# Altium PCB PCBPIC80_A3979_4lvl.PcbDoc (part 2 of 2)
Units mm, origin at the board's own origin, x right, y up, seen from the top; angles counter-clockwise.
Board outline 150.1 x 100.1 mm, 4 copper layers (Top Layer, InternalPlane1, InternalPlane2, Bottom Layer); 110 components, 115 nets, 451 pads, 191 vias.
Unrouted connection lines stored in the file: 6.
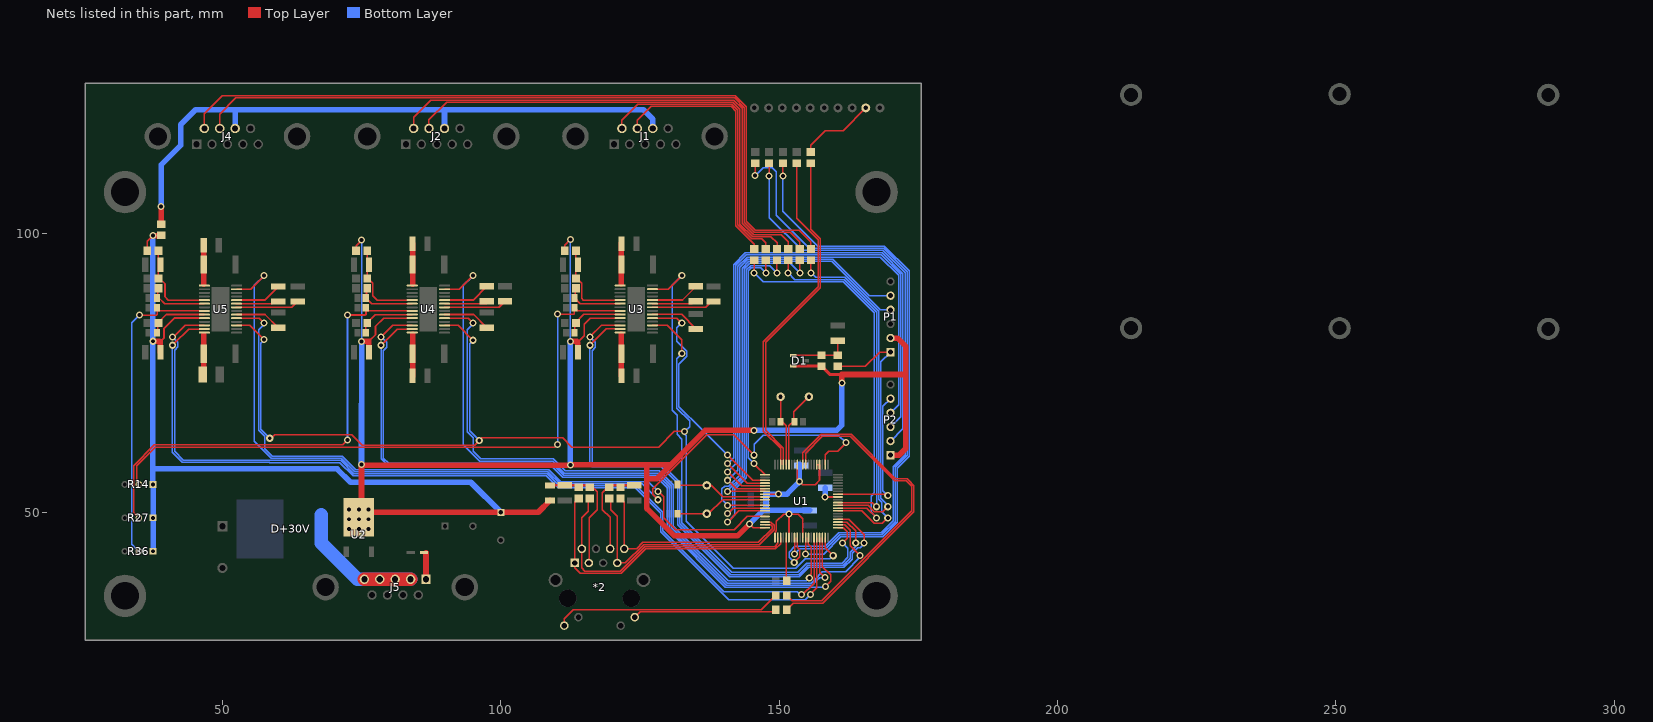
[diagram p4: the nets of this part, all layers, seen from the top]

## Via types
v1: diameter 1.27, hole 0.711, Top Layer to Bottom Layer, 191 vias

## Nets (pads, with @x,y where several pads share a name; then routed paths per layer and width w, separated by ;. In a path a pad name is that pad's centre, name@x,y a point inside that pad or via, vN(x,y) a via of type N, cw(c..) or ccw(c..) an arc to the next point about the centre after c; other vN are vias at no path point) (continued)
MS1_ALFA: U1.4 U3.13 | length 101
  Top Layer w0.254: v1(116,80) 118.926,82.926 U3.13@121.439,82.926 ; U1.4@160.55,48.75 162.45,48.75 165.25,45.95 v1(165.25,44.5)
  Bottom Layer w0.254: v1(116,80) 116,58.586 116.39,58.196 128.801,58.196 131.756,55.241 131.756,47.789 141.12,38.425 153.637,38.425 155.299,40.087 161.622,40.087 163.115,41.58 163.115,42.661 164.065,43.611 164.557,43.611 165.2,44.254 164.954,44.5 v1(165.25,44.5)
MS1_DELTA: U1.78 U4.13 | length 131
  Top Layer w0.254: v1(78.5,80) 81.412,82.912 U4.13@84.095,82.912 ; U1.78@157.75,45.45 157.75,40.25 159.25,38.75 159.25,37.65 v1(158.3,36.7)
  Bottom Layer w0.254: v1(78.5,80) 78.481,79.981 78.481,59.63 79.671,58.44 95.859,58.44 108.944,58.44 109.036,58.348 111.108,56.276 128.027,56.276 129.851,54.452 129.851,47 140.331,36.52 158.13,36.52 158.3,36.69 v1@158.159,36.549
MS1_FOCUS: U1.76 U5.13 | length 164.5
  Top Layer w0.254: v1@41.35,80.35 43.912,82.912 45.312,82.912 U5.13@46.757,82.912 ; v1@155.625,35 155.625,35.325 156.75,36.45 U1.76@156.75,45.45
  Bottom Layer w0.254: v1(41,80) 41,60.786 42.805,58.981 58.441,58.981 58.487,58.935 71.07,58.935 73.47,56.535 95.07,56.535 108.154,56.535 108.246,56.443 110.318,54.371 124.168,54.371 128.708,49.831 128.708,46.526 140.903,34.331 154.706,34.331 155.375,35 v1@155.625,35 ; v1@155.9,35 v1@156,34.9
  other v1: 155.625,35.25
MS2_ALFA: U1.3 U3.12 | length 99.2
  Top Layer w0.254: U1.3@160.55,48.25 162.15,48.25 163.75,46.65 v1(163.75,44.5)
  Top Layer w0.3: v1(116,81.5) 118.076,83.576 U3.12@121.439,83.576
  Bottom Layer w0.254: v1(116,81.5) 117,80.5 117,79.6 116.4,79 116.4,58.725 116.525,58.6 128.936,58.6 132.137,55.399 132.137,47.947 141.278,38.806 153.48,38.806 154.832,40.158 155.142,40.468 161.464,40.468 162.734,41.738 162.734,42.818 163.7,43.785 163.7,44.274 v1@163.474,44.5
MS2_DELTA: U1.77 U4.12 | length 130.2
  Top Layer w0.254: v1(78.5,81.5) 80.562,83.562 U4.12@84.095,83.562 ; U1.77@157.25,45.45 157.25,39.25 158,38.5 v1@158,38
  Bottom Layer w0.254: v1(78.5,81.5) 79.5,80.5 79.5,79.6 78.9,79 78.9,59.75 79.829,58.821 96.017,58.821 109.101,58.821 109.193,58.729 111.265,56.657 128.184,56.657 130.232,54.61 130.232,47.158 140.488,36.901 154.269,36.901 155.178,36.901 155.897,36.901 155.926,36.93 156.67,37.674 157.246,38.25 157.75,38.25 v1@158,38
  other v1: 158.25,38.25
MS2_FOCUS: U1.75 U5.12 | length 164.5
  Top Layer w0.254: v1(41,81.5) 41.3,81.5 43.362,83.562 U5.12@46.757,83.562 ; v1@154,35 156.289,37.289 156.289,45.411 U1.75@156.25,45.45
  Bottom Layer w0.254: v1(41,81.5) 42,80.5 42,79.7 41.4,79.1 41.4,60.925 42.963,59.362 58.599,59.362 58.645,59.316 71.228,59.316 73.628,56.916 95.228,56.916 108.312,56.916 108.404,56.824 110.476,54.752 124.326,54.752 129.089,49.989 129.089,46.684 140.015,35.758 153.242,35.758 v1@154,35
  other v1: 154,35.25
Net*2_1: *2.1 R20.2 U1.63 | length 52.7
  Top Layer w0.254: *2.1@113.284,40.894 113.284,40.066 114.3,39.05 121.625,39.05 126.009,43.434 149.321,43.434 150.25,44.363 U1.63@150.25,45.45 ; *2.1@113.305,40.894 113.305,51.805 R20.2@113.5,52
Net*2_2: *2.2 R19.2 U1.62 | length 51.3
  Top Layer w0.254: *2.2@114.554,43.434 114.554,39.996 115.119,39.431 121.467,39.431 122.549,40.513 125.851,43.815 149.163,43.815 149.75,44.402 U1.62@149.75,45.45 ; *2.2@114.575,43.434 114.575,49.025 115.7,50.15 115.7,52.05 R19.2@115.5,52.25
Net*2_3: *2.3 C18.2 L1.2 R19.1 R20.1 | length 23.1
  Top Layer w0.254: R19.1@115.5,54.5 116.5,54.5 117.3,53.7 117.3,50.475 115.845,49.02 *2.3@115.845,40.894
  Top Layer w0.5: L1.2@108.5,54.85 111,54.85 113.15,54.85 R19.1@116.1,54.85
Net*2_6: *2.6 C17.2 R17.1 R18.1 | length 17
  Top Layer w0.254: *2.6@119.634,43.434 119.634,49.066 118.25,50.45 118.25,53.55 118.95,54.25 R17.1@119.75,54.25
  Top Layer w0.4: R17.1@119.5,54.85 C17.2@124,54.85
Net*2_7: *2.7 R17.2 U1.58 | length 45.2
  Top Layer w0.254: R17.2@119.75,52.25 119.75,50.425 120.904,49.271 *2.7@120.904,40.894 122.391,40.894 125.693,44.196 146.41,44.196 149.096,46.882 149.096,47.675 148.521,48.25 U1.58@147.45,48.25
Net*2_8: *2.8 R18.2 U1.59 | length 39.2
  Top Layer w0.254: R18.2@121.5,52.5 122.195,51.805 *2.8@122.195,43.445 ; *2.8@122.174,43.434 124.393,43.434 125.536,44.577 146.252,44.577 148.715,47.04 148.715,47.517 148.482,47.75 U1.59@147.45,47.75
Net*2_9: *2.9 R10.2 | length 40.9
  Top Layer w0.254: *2.9@111.404,29.642 111.404,30.904 113,32.5 124.849,32.5 146.75,32.5 R10.2@149.335,35.085
Net*2_12: *2.12 R9.2 | length 25.4
  Top Layer w0.254: *2.12@124.388,31.5 125.007,32.119 148.975,32.119 R9.2@149.368,32.512
NetC2_2: C2.2 D1.1 R7.1 R8.2 | length 10.5
  Top Layer w0.254: D1.1@152.545,78.166 160.478,78.166 R8.2@160.528,78.216 C2.2@160.528,80.719
NetC3_1: C3.1 U1.36 Y1.1 | length 12.6
  Top Layer w0.254: Y1.1@150.25,70.75 150.25,66.55 151.25,65.55 U1.36@151.25,58.55
NetC4_2: C4.2 U1.35 Y1.2 | length 13.7
  Top Layer w0.254: U1.35@151.75,58.55 151.75,65.5 152.6,66.35 152.6,68.02 Y1.2@155.33,70.75
NetC5_1: C5.1 U1.50 Y2.1 | length 16.8
  Top Layer w0.254: C5.1@131.75,49.7 137.275,49.7 139.825,52.25 U1.50@147.45,52.25
NetC6_2: C6.2 U1.49 Y2.2 | length 17.2
  Top Layer w0.254: C6.2@131.75,55.5 131.75,54.825 137.755,54.825 139.83,52.75 U1.49@147.45,52.75
NetC7_1: C7.1 U3.22 | length 11.7
  Top Layer w0.254: U3.22@127.239,86.826 136.826,86.826 137.95,87.95 C7.1@138.5,87.95
NetC8_2: C8.2 R11.2 U3.14 | length 7.5
  Top Layer w1: C8.2@121.65,74.525 121.65,81.975
NetC9_2: C9.2 R12.2 U3.1 | length 7.2
  Top Layer w1: 121.65,91.05 C9.2@121.65,98.3
NetC10_2: C10.2 R15.2 U3.6 | length 10.2
  Top Layer w0.254: C10.2@113.25,88.5 114.274,87.476 U3.6@121.439,87.476 ; C10.2@113.4,88.65 R15.2@113.4,90.25
NetC11_2: C11.2 R16.2 R51.2 U3.5 | length 16.1
  Top Layer w0.254: R51.2@113.5,97 113.5,92.1 114.5,91.1 114.5,88.4 114.774,88.126 U3.5@121.439,88.126
NetC12_2: C12.2 R14.2 U3.8 | length 116.7
  Top Layer w0.254: R14.2@35,55 34.6,55.4 34.6,58.361 37.919,61.68 92.01,61.68 93.068,61.68 96.255,61.68 109.68,61.68 v1(110.2,62.2) ; v1(110.2,85.6) 113.2,85.6 113.2,86.7 C12.2@113.25,86.75 113.824,86.176 U3.8@121.439,86.176
  Bottom Layer w0.254: v1(110.2,62.2) 110.2,62.8 v1(110.2,85.6)
NetC13_2: C13.2 R13.2 U3.9 | length 10.5
  Top Layer w0.254: C13.2@113.25,82.25 113.25,83.85 114.926,85.526 U3.9@121.439,85.526
NetC14_2: C14.2 U3.20 | length 8.8
  Top Layer w0.254: U3.20@127.239,85.526 132.474,85.526 C14.2@135,83
NetC15_1: C15.1 U3.24 | length 8.8
  Top Layer w0.3: U3.24@127.239,88.126 132.625,88.125 C15.1@135.05,90.55
NetC15_2: C15.2 U3.23 | length 8
  Top Layer w0.3: U3.23@127.239,87.475 131.975,87.475 134.325,87.475 C15.2@135,88.15
NetC16_1: C16.1 U1.12 | length 4
  Top Layer w0.3: v1(158.25,52.75) U1.12@160.55,52.75
  Bottom Layer w1: v1(158.25,52.75) 158.275,52.75 158.25,52.725 C16.1@158.25,54.4
NetC19_1: C19.1 U4.22 | length 11.6
  Top Layer w0.35: U4.22@89.9,86.825 99.675,86.825 C19.1@101,88.15
NetC25_2: C25.2 R25.2 U4.9 | length 10.6
  Top Layer w0.254: C25.2@75.75,82.25 75.75,83.85 77.412,85.512 U4.9@84.095,85.512
NetC26_2: C26.2 R26.2 U4.6 | length 10.4
  Top Layer w0.254: C26.2@75.75,88.5 76.788,87.462 U4.6@84.095,87.462
  Top Layer w0.35: C26.2@75.9,88.65 R26.2@75.9,90.25
NetC27_2: C27.2 R28.2 R29.2 U4.5 | length 15.9
  Top Layer w0.254: R29.2@76,97 76,92.1 77,91.1 77,88.9 77.788,88.112 U4.5@84.095,88.112
NetC28_2: C28.2 R23.2 U4.14 | length 7.5
  Top Layer w1: C28.2@84.15,74.45 84.15,81.95
NetC29_2: C29.2 R27.2 U4.8 | length 86.1
  Top Layer w0.254: R27.2@35,49 34.098,49.902 34.098,58.398 37.8,62.1 59.075,62.1 71.6,62.1 v1(72.5,63) ; v1@72.15,62.65 v1@72.5,62.65 ; C29.2@75.638,86.162 U4.8@84.095,86.162
  Top Layer w0.35: v1(72.5,85.4) 75.6,85.4 75.75,85.55 C29.2@75.75,86.75
  Bottom Layer w0.35: v1@72.5,62.65 v1(72.5,85.4)
NetC30_2: C30.2 R30.2 R37.2 U5.5 | length 16.3
  Top Layer w0.3: R37.2@38.4,92 R37.2@38.5,92 ; R30.2@38.5,97 R37.2@38.5,92 ; U5.5@46.757,88.112 40.288,88.112 39.672,88.728 39.672,91.028 38.7,92 R37.2@38.5,92
NetC31_2: C31.2 U4.20 | length 8.6
  Top Layer w0.3: U4.20@89.895,85.512 95.138,85.512 C31.2@97.5,83.15
NetC32_1: C32.1 U4.24 | length 8.9
  Top Layer w0.35: U4.24@89.9,88.125 95.025,88.125 C32.1@97.5,90.6 C32.1@97.5,90.85
NetC32_2: C32.2 U4.23 | length 7.6
  Top Layer w0.254: U4.23@89.9,87.475 C32.2@97.5,87.475
NetC33_1: C33.1 U5.22 | length 11.6
  Top Layer w0.254: U5.22@52.402,86.827 62.427,86.827 63.35,87.75 C33.1@63.35,88
NetC34_2: C34.2 R33.2 U5.9 | length 10.6
  Top Layer w0.3: C34.2@38.4,82.4 38.4,84 39.912,85.512 U5.9@46.757,85.512
NetC35_2: C35.2 R35.2 U5.6 | length 10.5
  Top Layer w0.3: C35.2@38.25,88.5 38.6,88.5 39.638,87.462 U5.6@46.757,87.462 ; C35.2@38.4,88.65 R35.2@38.4,90.25
NetC37_2: C37.2 R31.2 U5.14 | length 7.3
  Top Layer w0.254: R31.2@46.6,78.55 R31.2@46.65,78.5
  Top Layer w0.6: R31.2@46.6,78.55 R31.2@46.8,78.75
  Top Layer w1: C37.2@46.657,74.907 46.657,81.9
NetC39_2: C39.2 U5.20 | length 8.4
  Top Layer w0.3: U5.20@52.557,85.512 57.638,85.512 C39.2@60,83.15
NetC40_1: C40.1 U5.24 | length 8.9
  Top Layer w0.35: U5.24@52.4,88.125 57.625,88.125 60,90.5 C40.1@60,90.85
NetC40_2: C40.2 U5.23 | length 7.9
  Top Layer w0.254: U5.23@52.4,87.475 C40.2@58.875,87.475
  Top Layer w0.35: C40.2@58.875,87.475 59.55,88.15 C40.2@60,88.15
NetC41_2: C41.2 R36.2 U5.8 | length 55.8
  Top Layer w0.254: v1(35.1,85.4) 38.1,85.4 38.25,85.55 38.25,86.162 38.838,86.162 U5.8@46.757,86.162
  Bottom Layer w0.254: R36.2@35,43 33.75,44.25 33.75,56.5 33.75,84.05 35,85.3 v1(35.1,85.4)
NetC50_2: C50.2 R24.2 U4.1 | length 7.2
  Top Layer w1: 84.15,90.975 C50.2@84.15,98.225
NetC51_2: C51.2 R32.2 U5.1 | length 7.2
  Top Layer w1: 46.65,91 C51.2@46.65,98.2
NetD+5V_1: D+5V.1 J5.1 | length 4.8
  Top Layer w1: J5.1@86.566,37.973 D+5V.1@86.566,42.75
NetD+30V_1: D+30V.1 D+30V.3 J5.2 J5.3 J5.4 J5.5 | length 32.1
  Top Layer w2.5: J5.5@75.486,37.973 J5.2@83.796,37.973
  Bottom Layer w2.5: D+30V.1@67.75,49.54 D+30V.3@67.75,44.46 74.237,37.973 J5.2@83.796,37.973
NetJ1_8: J1.8 J2.8 J4.8 R22.2 | length 114.3
  Top Layer w1: R22.2@39,101.75 v1(39,104.9)
  Bottom Layer w1: v1(39,104.9) 39,112.4 42.5,115.9 42.5,119.6 45.2,122.3 125.6,122.3 127.285,120.615 J1.8@127.285,118.94 ; J4.8@52.285,118.94 52.285,122.285 ; J2.8@89.885,118.94 89.885,122.285
NetP1_1: P1.1 R8.1 U1.9 | length 49.3
  Top Layer w0.254: R8.1@160.528,76.216 165.491,76.216 168.025,78.75 P1.1@170,78.75 ; U1.9@160.55,51.25 165.95,51.25 167.1,50.1 168.6,50.1 v1(169.5,51) ; v1@169.45,51.25 v1@169.5,51.2
  Bottom Layer w0.254: v1@169.5,51.1 169.5,51.239 168.243,52.496 168.243,76.993 P1.1@170,78.75
NetP1_4: P1.4 U1.47 | length 78.7
  Top Layer w0.254: v1(140.75,53.75) U1.47@147.45,53.75
  Bottom Layer w0.254: v1(140.75,53.75) 140.75,53.928 143.324,56.502 143.324,58.208 143.324,93.869 144.531,95.076 159.44,95.076 168.146,86.37 P1.4@170,86.37
NetP1_5: P1.5 U1.52 | length 82.1
  Top Layer w0.254: v1(140.75,51.25) U1.52@147.45,51.25
  Bottom Layer w0.254: v1(140.75,51.25) 139.7,52.3 139.7,54.2 140.194,54.694 140.977,54.694 142.943,56.659 142.943,57.404 142.943,58.365 142.943,94.027 144.373,95.457 159.598,95.457 166.145,88.91 P1.5@170,88.91
NetP2_2: P2.2 U1.44 | length 108.2
  Top Layer w0.254: v1(140.75,58.75) 144.25,55.25 U1.44@147.45,55.25
  Bottom Layer w0.254: v1(140.75,58.75) 141.8,59.8 141.8,94.5 143.9,96.6 168.484,96.6 172.212,92.872 172.212,65.002 P2.2@170,62.79
NetP2_3: P2.3 U1.45 | length 105.4
  Top Layer w0.254: v1(140.75,57.25) 143.25,54.75 U1.45@147.45,54.75
  Bottom Layer w0.254: v1(140.75,57.25) 142.181,58.681 142.181,94.342 144.058,96.219 168.326,96.219 171.831,92.714 171.831,67.161 P2.3@170,65.33
NetP2_4: P2.4 U1.46 | length 102.7
  Top Layer w0.254: v1(140.75,55.75) 142.25,54.25 U1.46@147.45,54.25
  Bottom Layer w0.254: v1(140.75,55.75) 142.562,57.562 142.562,58.523 142.562,94.184 144.216,95.838 168.168,95.838 171.45,92.556 171.45,69.32 P2.4@170,67.87
NetP2_5: P2.5 U1.13 | length 27.4
  Top Layer w0.254: U1.13@160.55,53.25 169.25,53.25 v1(169.5,53)
  Bottom Layer w0.254: v1(169.5,53) 168.624,53.876 168.624,69.034 P2.5@170,70.41
NetR9_1: R9.1 U1.30 | length 62.1
  Top Layer w0.254: R9.1@151.368,32.512 152.556,33.7 157.8,33.7 174.2,50.1 174.2,54.8 173.262,55.738 172.988,56.012 170.9,56.012 170.499,56.413 162.912,64 157.584,64 154.25,60.666 U1.30@154.25,58.55
NetR10_1: R10.1 U1.29 | length 60
  Top Layer w0.254: R10.1@151.368,35.052 152.339,34.081 157.642,34.081 173.819,50.258 173.819,54.642 173.104,55.357 172.83,55.631 170.743,55.631 162.755,63.619 157.741,63.619 154.75,60.628 U1.29@154.75,58.55
NetR21_2: R21.2 U1.65 | length 7.6
  Top Layer w0.254: R21.2@151.211,37.876 151.25,37.915 151.25,43.95 U1.65@151.25,45.45
NetR38_1: R38.1 U1.68 | length 111.7
  Top Layer w0.254: v1(145.675,110.45) R38.1@145.675,112.7 ; v1(152.75,42.5) U1.68@152.75,45.45
  Bottom Layer w0.254: v1(145.675,110.45) 147.125,111.9 148.775,111.9 149.475,111.2 149.475,103.375 155.431,97.419 168.742,97.419 172.974,93.187 172.974,60.213 170.819,58.058 170.819,48.335 168.441,45.957 160.873,45.957 158.392,43.476 153.726,43.476 v1(152.75,42.5)
NetR39_1: R39.1 U1.69 | length 112
  Top Layer w0.254: v1(148.175,110.375) R39.1@148.175,112.7 ; v1(152.7,41) 153.7,42 153.7,43.3 153.25,43.75 U1.69@153.25,45.45
  Bottom Layer w0.254: v1@148.025,110.375 148.2,110.2 148.2,102.934 154.096,97.038 168.584,97.038 172.593,93.029 172.593,60.371 170.438,58.216 170.438,48.493 168.283,46.338 160.716,46.338 158.235,43.857 152.835,43.857 151.8,42.822 151.8,41.9 v1(152.7,41)
NetR40_1: R40.1 U1.72 | length 103.6
  Top Layer w0.254: v1(150.675,110.375) R40.1@150.675,112.7 ; v1(154.75,42.5) U1.72@154.75,45.45
  Bottom Layer w0.254: v1(150.675,110.375) 150.675,104.025 156.9,97.8 168.9,97.8 173.355,93.345 173.355,60.055 171.2,57.9 171.2,48.178 168.598,45.576 161.031,45.576 157.955,42.5 v1(154.75,42.5)
NetR41_1: R41.1 U1.38 | length 61.1
  Top Layer w0.254: U1.38@150.25,58.55 150.25,61.461 147.157,64.554 147.157,80.657 156.988,90.488 156.988,98.973 153.175,102.786 R41.1@153.175,112.7
NetR42_1: R42.1 U1.37 | length 60.3
  Top Layer w0.254: U1.37@150.75,58.55 150.75,61.5 147.538,64.712 147.538,72.098 147.538,80.499 157.369,90.33 157.369,99.131 155.675,100.825 R42.1@155.675,112.7
NULL_ALFA: R6.2 U1.8 | length 72
  Top Layer w0.254: v1@145.542,93.042 R6.2@145.542,95.366 ; U1.8@160.55,50.75 165.75,50.75 v1(167.5,49)
  Bottom Layer w0.254: v1(145.5,93) 147.1,91.4 161.5,91.4 167.1,85.8 167.1,53.5 166.5,52.9 166.5,50 v1(167.5,49)
NULL_ALFA_CON: J1.7 R6.1 | length 46.8
  Top Layer w0.254: J1.7@124.515,118.94 124.515,120.415 127,122.9 141.356,122.9 142.195,122.061 142.195,101.461 145.542,98.114 R6.1@145.542,97.166
NULL_DELTA: R3.2 U1.54 | length 62.9
  Top Layer w0.254: v1(140.75,48.25) 142.75,50.25 U1.54@147.45,50.25 ; v1(149.6,93) R3.2@149.6,95.36
  Bottom Layer w0.254: v1(140.75,48.25) 142.02,49.52 142.02,54.12 144.086,56.186 144.086,93.553 144.847,94.314 148.286,94.314 v1(149.6,93)
NULL_DELTA_CON: J2.7 R3.1 | length 89.1
  Top Layer w0.254: J2.7@87.1,118.955 87.1,120.5 90.262,123.662 141.672,123.662 142.957,122.377 142.957,101.777 145.242,99.492 148.508,99.492 149.606,98.394 R3.1@149.606,97.166
NULL_FOCUS: R1.2 U1.53 | length 65.7
  Top Layer w0.254: v1(140.75,49.75) 141.75,50.75 U1.53@147.45,50.75 ; v1(153.7,93) R1.2@153.7,95.336
  Bottom Layer w0.254: v1(140.75,49.75) 141.639,50.639 141.639,54.278 143.705,56.344 143.705,58.05 143.705,93.711 144.689,94.695 152.005,94.695 v1(153.7,93)
NULL_FOCUS_CON: J4.7 R1.1 | length 132.4
  Top Layer w0.254: J4.7@49.4,119.14 J4.7@49.6,118.94 ; J4.7@49.515,118.94 49.515,121.515 52.424,124.424 141.987,124.424 143.719,122.693 143.719,102.093 145.557,100.254 151.996,100.254 153.67,98.58 R1.1@153.67,97.166
POS_ALFA: R5.2 U1.41 | length 44.4
  Top Layer w0.254: v1(145.5,58.75) 145.5,58.25 145.725,58.475 U1.41@147.45,56.75 ; v1@147.574,93.026 R5.2@147.574,95.366
  Bottom Layer w0.254: v1(145.5,58.75) 144.467,59.783 144.467,93.395 145.005,93.933 146.667,93.933 v1(147.6,93)
POS_ALFA_CON: J1.6 R5.1 | length 52.1
  Top Layer w0.254: J1.6@121.745,118.94 121.745,120.42 124.606,123.281 141.514,123.281 142.576,122.219 142.576,101.619 145.084,99.111 146.889,99.111 147.574,98.426 R5.1@147.574,97.166
POS_DELTA: R4.2 U1.10 | length 63.3
  Top Layer w0.254: v1(151.6,93) R4.2@151.6,95.328 ; U1.10@160.55,51.75 166.75,51.75 v1(167.5,51)
  Bottom Layer w0.254: v1(151.6,93) 152.806,91.794 161.645,91.794 167.481,85.958 167.481,69.507 167.481,54.681 v1@167.481,51
POS_DELTA_CON: J2.6 R4.1 | length 94.6
  Top Layer w0.254: J2.6@84.345,118.94 84.345,120.97 87.418,124.043 141.829,124.043 143.338,122.535 143.338,101.935 145.399,99.873 150.377,99.873 151.638,98.612 R4.1@151.638,97.166
POS_FOCUS_CON: J4.6 R2.1 | length 137.3
  Top Layer w0.254: J4.6@46.745,118.94 46.745,121.595 49.955,124.805 142.145,124.805 144.1,122.85 144.1,102.25 145.715,100.635 153.615,100.635 155.702,98.548 R2.1@155.702,97.166
POSFOCUS: R2.2 U1.7 | length 65.5
  Top Layer w0.254: v1(155.7,93) R2.2@155.7,95.364 ; U1.7@160.55,50.25 164.85,50.25 167.1,48 168.5,48 v1(169.5,49)
  Bottom Layer w0.254: v1(155.7,93) 156.525,92.175 161.803,92.175 167.862,86.116 167.862,54.523 167.862,52.338 168.4,51.8 168.4,50.1 v1(169.5,49)
POWER/RUN_LED: D6.1 R42.2 | length 13.9
  Top Layer w0.254: R42.2@155.675,114.7 155.675,115.95 158.292,118.567 161.497,118.567 D6.1@165.555,122.625
RESET: U1.79 U3.17 U4.17 U5.17 | length 204.5
  Top Layer w0.254: U5.17@52.557,83.562 54.938,83.562 v1(57.5,81) ; v1@58.5,63 59.42,63.92 71.458,63.92 73.219,63.92 75.078,62.061 89.082,62.061 93.782,62.061 95.286,62.061 96.582,63.357 111.127,63.357 112.776,61.708 128.363,61.708 131.168,64.513 v1(133.013,64.513) ; U4.17@89.895,83.562 92.338,83.562 v1(95,80.9) ; U3.17@127.239,83.576 129.924,83.576 132.5,81 v1(132.5,78.5) ; U1.79@158.25,45.45 158.25,43.65 v1(159.7,42.2)
  Bottom Layer w0.254: v1(57.5,81) 56.9,80.4 56.9,64.9 58.061,63.739 58.5,63.739 v1@58.5,63 ; v1(95,80.9) 94.4,80.3 94.4,64.625 v1(96.125,62.9) ; v1(132.5,78.5) 131.619,77.619 131.619,68.681 133.9,66.4 133.9,65.4 v1(133.013,64.513) 133.365,64.161 132.9,64.161 133.28,63.781 133.28,48.42 141.751,39.949 153.006,39.949 153.689,40.632 154.668,41.611 159.111,41.611 v1(159.7,42.2)
  other v1: 58.5,63.3
"SLEEP ALFA": U1.1 U3.27 | length 94.1
  Top Layer w0.254: U3.27@127.239,90.076 130.076,90.076 v1(132.5,92.5) ; U1.1@160.55,47.25 161.5,47.25 162.25,46.5 162.25,45.35 v1(161.4,44.5)
  Bottom Layer w0.254: v1(132.5,92.5) 130.8,90.8 130.8,68.3 131.67,67.43 131.67,64.005 132.518,63.157 132.518,48.105 141.435,39.187 153.322,39.187 154.451,40.316 154.984,40.849 161.306,40.849 162.353,41.895 162.353,43.547 v1(161.4,44.5)
"SLEEP DELTA": U1.2 U4.27 | length 133.4
  Top Layer w0.254: U4.27@89.895,90.062 92.562,90.062 v1(95,92.5) ; U1.2@160.55,47.75 161.772,47.75 162.75,46.772 162.75,44 v1(164.5,42.25)
  Bottom Layer w0.254: v1(95,92.5) 95,92.257 94.757,92.257 93.254,90.754 93.254,62.171 96.223,59.202 109.259,59.202 109.323,59.138 111.423,57.038 128.342,57.038 130.613,54.768 130.613,47.316 140.646,37.282 154.111,37.282 155.02,37.282 155.739,37.282 156.289,37.832 157.757,39.3 161.912,39.3 164.5,41.888 v1(164.5,42.25)
"SLEEP FOCUS": U1.22 U5.27 | length 164.9
  Top Layer w0.254: U5.27@52.557,90.062 55.062,90.062 v1(57.5,92.5) ; v1@128,52.5 127.25,53.25 127.25,54.184 137.012,63.946 141.804,63.946 v1(145.5,60.25) ; U1.22@158.25,58.55 158.25,60.35 158.9,61 160.5,61 v1(162,62.5)
  Bottom Layer w0.254: v1(57.5,92.5) 55.757,90.757 55.757,62.743 58.803,59.697 71.386,59.697 73.786,57.297 95.386,57.297 108.47,57.297 108.562,57.205 110.634,55.133 125.367,55.133 v1@128,52.5 ; v1(145.5,60.25) 145.5,62.2 147.162,63.862 160.638,63.862 v1(162,62.5)
  other v1: 128.25,52.25
STEPALFA: U1.43 U3.19 | length 43.8
  Top Layer w0.254: U3.19@127.239,84.876 131.624,84.876 v1(132.5,84) v1@132,84 ; v1(140.7,60.3) 145.25,55.75 U1.43@147.45,55.75
  Bottom Layer w0.254: v1(132.5,84) 131.611,83.111 131.611,80.689 133.4,78.9 133.4,78 132,76.6 132,69 136,65 v1(140.7,60.3)
STEPDELTA: U1.73 U4.19 | length 111.5
  Top Layer w0.254: U4.19@89.895,84.862 94.138,84.862 v1(95,84) ; U1.73@155.25,45.45 155.25,44.25 155.75,43.75 155.75,38.95 155.4,38.6 v1(155.4,38.2)
  Bottom Layer w0.254: v1(95,84) 95,83.757 94.016,82.773 94.016,64.47 95.075,63.411 95.075,60.925 96.417,59.583 109.417,59.583 109.481,59.519 111.581,57.419 128.5,57.419 130.994,54.925 130.994,47.473 140.804,37.663 153.953,37.663 154.862,37.663 v1(155.4,38.2)
STEPFOCUS: U1.56 U5.19 | length 128.1
  Top Layer w0.254: U5.19@52.557,84.862 56.638,84.862 v1(57.5,84) ; v1@128,54 129.25,52.75 129.25,49.05 131.394,46.906 141.89,46.906 141.906,46.906 144.25,49.25 U1.56@147.45,49.25
  Bottom Layer w0.254: v1(57.5,84) 57.5,83.757 56.519,82.776 56.519,64.742 57.6,63.661 57.6,61.439 58.961,60.078 71.544,60.078 73.944,57.678 95.544,57.678 108.628,57.678 108.72,57.586 110.792,55.514 126.486,55.514 v1(128.25,53.75)
VCC: C20.1 C21.1 C22.1 C23.1 C24.1 C43.1 C55.1 D1.2 L1.1 P1.2 P2.1 R7.2 R14.1 R22.1 R27.1 R29.1 R30.1 R36.1 R51.1 U1.24 U1.25 U1.32 U1.48 U1.60 U1.61 U1.66 U1.71 U2.4 U3.10 U4.10 U5.10 | length 534.5
  Top Layer w0.254: R30.1@36.5,97 36.5,98.7 v1(37.5,99.7) ; R29.1@74,97 74,97.9 v1(75,98.9) ; R51.1@111.5,97 111.5,98 v1(112.5,99) ; v1(144.675,47.925) 145.35,47.25 U1.60@147.45,47.25 ; U1.61@149.25,45.45 149.25,46.425 149.5,46.675 149.5,48.35 150.825,49.675 v1(151.725,49.675) 153.425,49.675 154.25,48.85
  Top Layer w0.3: C23.1@76.3,78.8 C23.1@76.35,78.75 ; 76.3,80.7 77.5,81.9 77.5,83.4 78.962,84.862 U4.10@84.095,84.862 ; 113.6,80.7 114,80.7 115,81.7 115,83.8 116.076,84.876 U3.10@121.439,84.876 ; U1.48@147.45,53.25 v1(149.875,53.25) ; U1.66@151.75,45.45 v1@151.75,49.65 ; U1.32@153.25,58.55 153.25,55.9 v1(153.617,55.533) 154.225,54.925 156.45,54.925 157.25,55.725 U1.24@157.25,58.55 U1.25@156.75,58.55 ; U1.71@154.25,45.45 154.25,48.85
  Top Layer w0.35: 38.7,80.722 38.922,80.722 39.5,81.3 39.5,83 41.362,84.862 U5.10@46.757,84.862
  Top Layer w0.5: D1.2@152.545,76.266 R7.2@157.734,76.266 ; v1@161.075,73.3 v1@161.25,73.125
  Top Layer w0.6: R7.2@157.607,76.216 159.073,74.75 161.25,74.75
  Top Layer w1: v1(37.5,99.7) 38.95,99.7 R22.1@39,99.75 ; v1(37.522,80.722) 38.7,80.722 ; C43.1@38.85,78.75 38.85,80.65 ; U2.4@74.975,49.575 v1@74.975,58.475 ; v1(75,58.6) 74.975,58.575 v1@74.975,58.475 ; v1(75,80.7) 76.3,80.7 C23.1@76.3,78.8 ; U2.4@75.475,50 C20.1@100,50 106.722,50 L1.1@108.839,52.117 ; 98.75,58.475 98.105,58.475 ; v1(112.5,80.7) 113.6,80.7 113.85,80.45 C55.1@113.85,78.75 C55.1@113.85,78.7 ; v1@112.675,58.475 98.105,58.475 ; v1@112.725,58.525 126.25,58.525 ; 130.5,58.525 126.25,58.525 ; v1(144.675,47.925) 142.5,45.75 131.175,45.75 126.246,50.679 126.246,56 ; v1(145.5,64.7) 136.7,64.7 128,56 126.246,56 ; v1(161.25,73.25) 161.25,74.75 172.75,74.75 ; P2.1@170,60.25 171.5,60.25 172.75,61.5 172.75,74.75 ; P1.2@170,81.29 171.21,81.29 172.75,79.75 172.75,74.75 ; v1@74.975,58.475 98.105,58.475 ; 126.246,56 126.246,58.271 126.25,58.275 126.25,58.525
  Bottom Layer w0.254: v1(75,80.7) v1(75,98.9) ; v1(112.5,80.7) v1(112.5,99) ; v1(149.875,53.25) v1@150.125,53.5
  Bottom Layer w0.5: C24.1@147.6,52.25 C24.1@147.6,52.95
  Bottom Layer w1: R14.1@37.5,55 37.5,57.8 ; v1(37.5,99.7) 37.5,57.8 ; R36.1@37.54,43 R14.1@37.54,55.1 ; v1@74.975,58.475 74.975,58.6 v1(75,80.7) ; C20.1@100,50 94.6,55.4 73,55.4 70.6,57.8 37.5,57.8 ; v1@112.5,58.75 v1(112.5,80.7) ; v1(144.675,47.925) 147.6,50.85 C24.1@147.6,52.25 ; v1(145.5,64.7) 160.3,64.7 161.25,65.65 v1(161.25,73.25) ; 147.6,50.35 151.8,50.35 ; C24.1@147.6,52.95 147.6,53.25 v1(149.875,53.25) 151.4,53.25 v1@153.4,55.25 ; v1@151.8,49.75 151.8,50.35 ; v1(153.617,55.533) 153.624,58.401 C22.1@153.625,58.65 ; C21.1@155.5,50.35 151.8,50.35
  other v1: 72.75,47 74.5,47 76.25,47 72.75,48.75 74.5,48.75 76.25,48.75 72.75,50.5 74.5,50.5 76.25,50.5 112.5,58.5
pads on no net: *2.4 *2.5 *2.15 *2.16 D1.3 P1.6 U1.5 U1.6 U1.14 U1.18 U1.19 U1.20 U1.21 U1.23 U1.33 U1.39 U1.40 U1.42 U1.55 U1.74

## Polygon pours and split planes (outlines as drawn)
GND on Top Layer "Bottom Layer-No Net" (solid, remove dead copper, pour order 1000): 25.4,127.1 25.4,27 175.5,27 175.5,127.1 25.4,127.1
VCC on Top Layer "Bottom Layer-No Net" (solid, remove dead copper, pour order 1000): 51.4,61.325 109.844,61.325 109.844,32.3 51.4,32.3
VCC on Top Layer "Bottom Layer-No Net" (solid, remove dead copper, pour order 1001): 109.825,59.254 109.837,59.275 131.15,59.275 131.15,55.525 109.825,55.525
GND on Bottom Layer "Bottom Layer-No Net" (solid, remove dead copper, pour order 1002): 25.4,127.1 25.4,27 175.5,27 175.5,127.1 25.4,127.1
VCC on Bottom Layer "Bottom Layer-No Net" (solid, remove dead copper, pour order 1000): 69.3,58.44 69.3,41.7 108.6,41.7 108.6,58.44
+30 on Bottom Layer "Bottom Layer-No Net 1" (solid, pour order 1000): 37.55,57.8 69.7,57.8 69.7,30.2 37.55,30.2 37.55,57.8
GND on InternalPlane1 (split plane): 174.99,27.51 25.91,27.51 25.91,126.59 174.99,126.59
GND on InternalPlane2 (split plane): 174.99,27.51 25.91,27.51 25.91,126.59 174.99,126.59

## Silkscreen, mask and mechanical layers (free items; w line width, h text height)
Top Overlay:
  lines w0.254: 22.992,28.524 23.5,27 ; 22.992,125.476 23.5,127 ; 23.246,27 23.754,27 ; 23.246,127 23.754,127 ; 23.5,71.261 23.5,27 ; 23.5,82.739 23.5,127 ; 24.008,28.524 23.5,27 ; 24.008,125.476 23.5,127 ; 25.5,24.746 25.5,25.254 ; 27.024,24.492 25.5,25 ; 27.024,25.508 25.5,25 ; 94.761,25 25.5,25 ; 103.425,23.725 109.45,23.725 ; 106.239,25 175.5,25 ; 173.976,24.492 175.5,25 ; 173.976,25.508 175.5,25 ; 175.5,24.746 175.5,25.254
  text "Focus" at 144.7,118.5 h1.52
  text "Alpha" at 154.8,118.2 h1.52
  text "Power" at 164.7,118.2 h1.52
  text "Delta" at 149.8,116.3 h1.52
  text "Run" at 159.9,116.2 h1.52
  text "Delta" at 95.5,112.3 h1.52
  text "Alpha" at 132.9,112.2 h1.52
  text "Focus" at 57.9,111.9 h1.52
  text "Programm" at 167.9,79.8 h1.52 r90
  text "100 (mm)" at 24.414,71.515 h1.52 r90
  text "SPI" at 168.1,61.7 h1.52 r90
  text "Alpha" at 25.7,53.1 h1.52
  text "Delta" at 25.7,46.7 h1.52
  text "Focus" at 25.7,41 h1.52
  text "Power" at 77.9,40.3 h1.52
  text "Ethernet" at 127.3,34.6 h1.52
  text "150 (mm)" at 95.015,24.086 h1.52

## Text inside footprints (layer, text, board x,y; h text height)
C1: Top Overlay "+" at 49.25,53.225 h1.5 r270
C20: Top Overlay "+" at 99.25,52.05 h1.5 r270
C56: Top Overlay "+" at 87.95,46.75 h1.5
Cool: Bottom Overlay "50 (mm)" at 220.811,104.802 h1.52 r180; Bottom Overlay "50 (mm)" at 289.083,108.718 h1.52 r90; Bottom Overlay "50 (mm)" at 214.083,108.718 h1.52 r90; Bottom Overlay "50 (mm)" at 251.583,108.718 h1.52 r90
J1: Top Overlay "6" at 121.245,122.045 h1.5; Top Overlay "9" at 129.555,122.045 h1.5; Top Overlay "5" at 130.94,112.645 h1.5; Top Overlay "1" at 120.11,112.645 h1.5
J2: Top Overlay "6" at 83.845,122.045 h1.5; Top Overlay "9" at 92.155,122.045 h1.5; Top Overlay "5" at 93.54,112.645 h1.5; Top Overlay "1" at 82.71,112.645 h1.5
J4: Top Overlay "6" at 46.245,122.045 h1.5; Top Overlay "9" at 54.555,122.045 h1.5; Top Overlay "5" at 55.94,112.645 h1.5; Top Overlay "1" at 45.11,112.645 h1.5
J5: Top Overlay "6" at 85.681,32.028 h1.5 r180; Top Overlay "9" at 77.371,32.028 h1.5 r180; Top Overlay "5" at 75.986,41.428 h1.5 r180; Top Overlay "1" at 86.816,41.428 h1.5 r180